# EAGLE board OPT_Board (EAGLE 9.3.0)
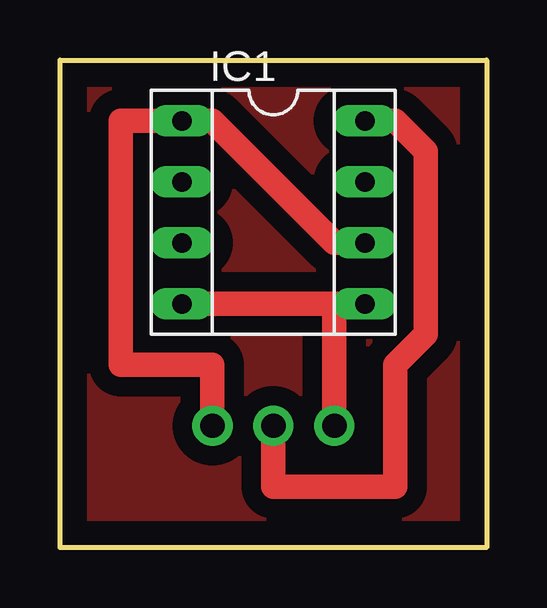
[diagram p0: board, top side]

Size 17.78 x 20.32 mm. Coordinates in mm from the lower left corner, seen from the top.
Outline: 0,0 0,20.32 17.78,20.32 17.78,0 0,0
Copper layers (1*16): Top 0.035mm / dielectric 1.5mm / Bottom 0.035mm
Design rules "default": minimum track width 6mil, minimum drill 0.35mm, track to track 6mil, track to pad 6mil, pad to pad 6mil, via to via 6mil, smd to smd 6mil, copper to edge 40mil, drill to drill 6mil, minimum pad ring 10mil, minimum via ring 8mil, stop-mask expansion 4mil, vias tented up to drill 0mil, thermal gap 10mil

## Footprints (pad centres in the part's own frame; a part is rotated, then mirrored left to right if it is on the bottom)
SOCKET-08 = drill 0.813 long: 1 -3.81,-3.81; 2 -1.27,-3.81; 3 1.27,-3.81; 4 3.81,-3.81; 5 3.81,3.81; 6 1.27,3.81; 7 -1.27,3.81; 8 -3.81,3.81
1X03-CLEANBIG = drill 1.016 pad 1.676: 1 -2.54,0; 2 0,0; 3 2.54,0

## Placement (x,y rotation side)
IC1  [SOCKET-08]  8.89,13.97 270 top
JP1  [1X03-CLEANBIG]  8.89,5.08 180 top

## Library data of the parts
IC1 = ic-package
JP1 = adafruit

## Nets
N$1: IC1.8 JP1.2
N$2: IC1.4 IC1.5 JP1.1
N$3: IC1.1 IC1.6 JP1.3

## Tracks (layer width: path | path; a pad name or v marks a point on that pad's centre or on a via)
N$1
  Top 1.016: JP1.2 8.89,2.54 13.97,2.54 13.97,7.62 15.24,8.89 15.24,16.51 13.97,17.78 IC1.8
N$2
  Top 1.016: JP1.1 11.43,10.16 IC1.5 IC1.4
N$3
  Top 1.016: IC1.6 11.43,12.7 6.35,17.78 IC1.1 2.54,17.78 2.54,7.62 6.35,7.62 JP1.3
TOP_POUR
  pour Top (isolate 0.813): 0,20.32 17.78,20.32 17.78,0 0,0